# EAGLE board BassDrum (EAGLE 6.5.0)
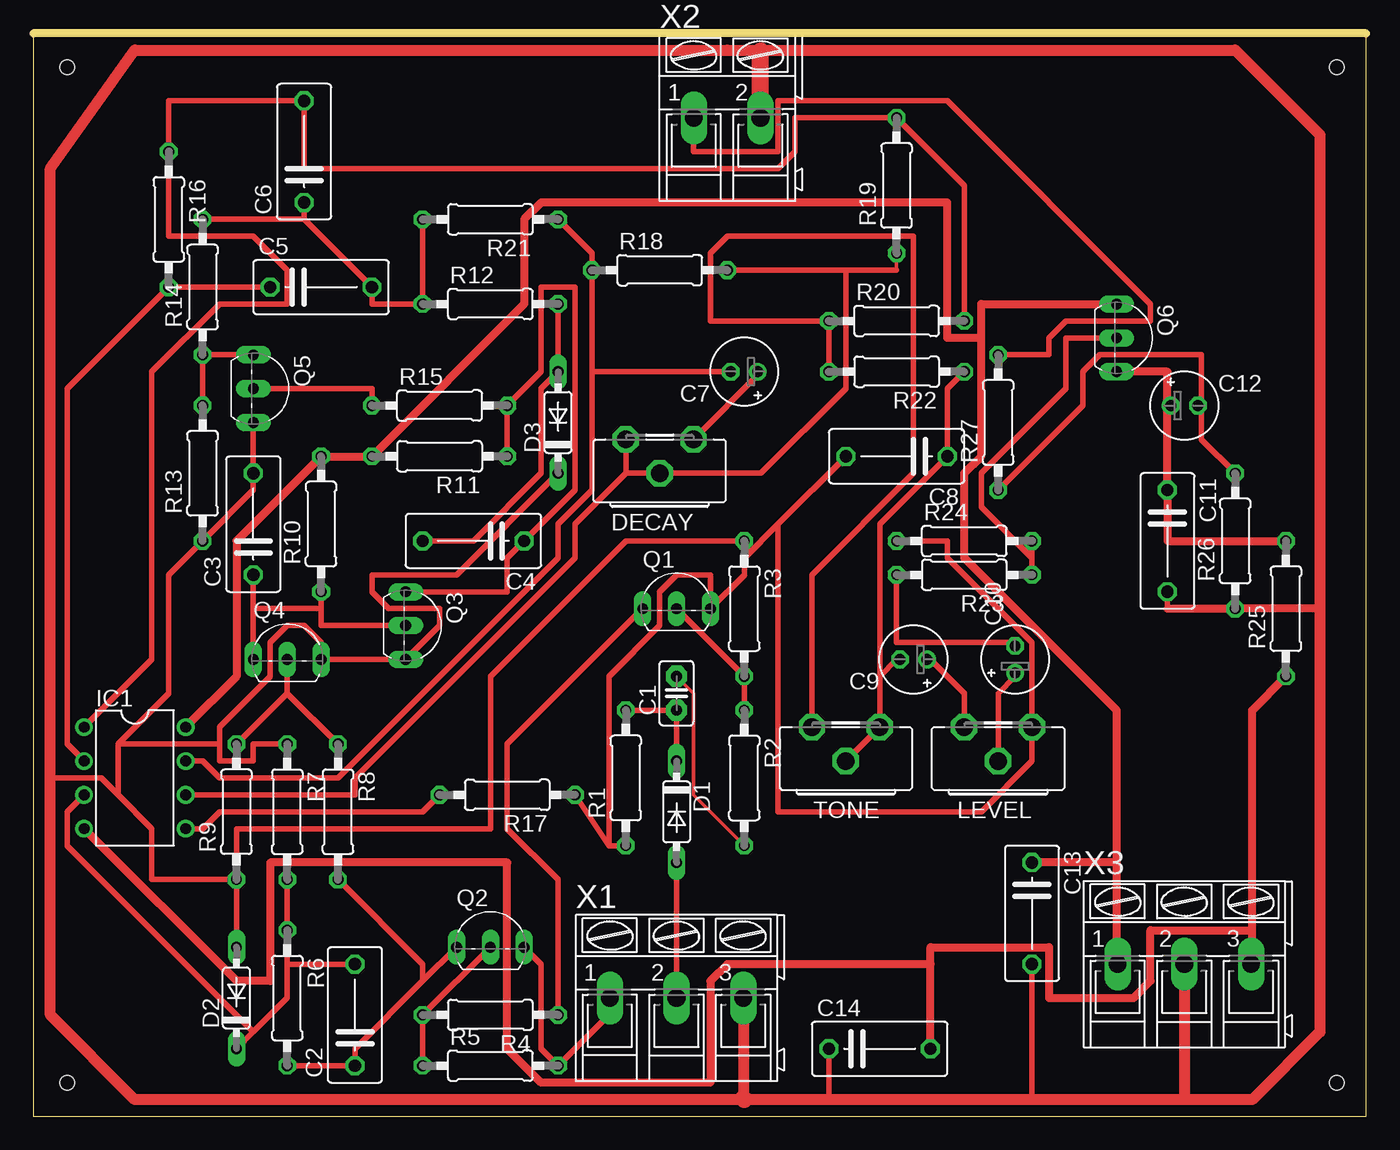
[diagram p0: board, top side]

Size 100 x 81.27 mm. Coordinates in mm from the lower left corner, seen from the top.
Outline: 0,0 100,0 100,81.27 0,81.27 0,0
Copper layers (1*16): Top 0.035mm / dielectric 1.5mm / Bottom 0.035mm
Design rules "default": minimum track width 10mil, minimum drill 24mil, track to track 8mil, track to pad 8mil, pad to pad 8mil, via to via 8mil, smd to smd 8mil, copper to edge 40mil, drill to drill 8mil, minimum pad ring 10mil, minimum via ring 8mil, stop-mask expansion 4mil, vias tented up to drill 0mil, thermal gap 10mil
Holes 1.1 mm at 2.54,2.54 97.79,2.54 97.79,78.74 2.54,78.74

## Footprints (pad centres in the part's own frame; a part is rotated, then mirrored left to right if it is on the bottom)
C2.5-2 = drill 0.813 pad 1.6 octagon: 1 -1.27,0; 2 1.27,0
C075-042X103 = drill 0.914 octagon: 1 -3.81,0; 2 3.81,0
E2-5 = drill 0.813 pad 1.27: + -1.016,0 | drill 0.813 pad 1.27 octagon: - 1.016,0
DO35-7 = drill 0.813 long: A 3.81,0; C -3.81,0
CA9H = drill 1.321 octagon: A -2.54,0; E 2.54,0; S 0,2.54
DIL08 = drill 0.813 pad 1.27: 1 -3.81,-3.81; 2 -1.27,-3.81; 3 1.27,-3.81; 4 3.81,-3.81; 5 3.81,3.81; 6 1.27,3.81; 7 -1.27,3.81; 8 -3.81,3.81
TO92-EBC = drill 0.813 long: B 0,-1.27; C -2.54,-1.27; E 2.54,-1.27
0207/10 = drill 0.813 octagon: 1 -5.08,0; 2 5.08,0
AK300/3 = drill 1.321 long: 1 -5.004,0; 2 0,0; 3 5.004,0
AK300/2 = drill 1.321 long: 1 -2.515,0; 2 2.489,0

## Placement (x,y rotation side)
C1  0.1  [C2.5-2]  48.26,31.75 90 top
C2  15n  [C075-042X103]  24.13,7.62 90 top
C3  100n  [C075-042X103]  16.51,44.45 90 top
C4  33n  [C075-042X103]  33.02,43.18 180 top
C5  15n  [C075-042X103]  21.59,62.23 0 top
C6  15n  [C075-042X103]  20.32,72.39 90 top
C7  33u/6.3V  [E2-5]  53.34,55.88 180 top
C8  100n  [C075-042X103]  64.77,49.53 180 top
C9  0.47u/50V  [E2-5]  66.04,34.29 180 top
C10  0.47u/50V  [E2-5]  73.66,34.29 90 top
C11  220p  [C075-042X103]  85.09,43.18 270 top
C12  1u/50V  [E2-5]  86.36,53.34 0 top
C13  100n  [C075-042X103]  74.93,15.24 270 top
C14  100n  [C075-042X103]  63.5,5.08 0 top
D1  1N4148DO35-7  [DO35-7]  48.26,22.86 270 top
D2  1N4148DO35-7  [DO35-7]  15.24,8.89 90 top
D3  1N4148DO35-7  [DO35-7]  39.37,52.07 90 top
DECAY  500k  [CA9H]  46.99,50.8 180 top
IC1  TL072P  [DIL08]  7.62,25.4 270 top
LEVEL  10k  [CA9H]  72.39,29.21 180 top
Q1  BC546A  [TO92-EBC]  48.26,39.37 0 top
Q2  BC556A  [TO92-EBC]  34.29,13.97 0 top
Q3  BC546A  [TO92-EBC]  29.21,36.83 270 top
Q4  BC546A  [TO92-EBC]  19.05,35.56 0 top
Q5  BC546A  [TO92-EBC]  17.78,54.61 270 top
Q6  BC546A  [TO92-EBC]  82.55,58.42 270 top
R1  100k  [0207/10]  44.45,25.4 90 top
R2  22k  [0207/10]  53.34,25.4 270 top
R3  10k  [0207/10]  53.34,38.1 270 top
R4  10k  [0207/10]  34.29,7.62 180 top
R5  4.7k  [0207/10]  34.29,3.81 0 top
R6  100k  [0207/10]  19.05,8.89 270 top
R7  4.7k  [0207/10]  19.05,22.86 270 top
R8  8.2k  [0207/10]  22.86,22.86 270 top
R9  2.7k  [0207/10]  15.24,22.86 90 top
R10  1M  [0207/10]  21.59,44.45 90 top
R11  22k  [0207/10]  30.48,49.53 180 top
R12  1M  [0207/10]  34.29,60.96 0 top
R13  47k  [0207/10]  12.7,48.26 90 top
R14  6.9k  [0207/10]  12.7,62.23 90 top
R15  100k  [0207/10]  30.48,53.34 0 top
R16  1M  [0207/10]  10.16,67.31 270 top
R17  22k  [0207/10]  35.56,24.13 180 top
R18  47k  [0207/10]  46.99,63.5 0 top
R19  47k  [0207/10]  64.77,69.85 90 top
R20  220  [0207/10]  64.77,59.69 0 top
R21  470k  [0207/10]  34.29,67.31 180 top
R22  10k  [0207/10]  64.77,55.88 180 top
R23  82k  [0207/10]  69.85,40.64 180 top
R24  100k  [0207/10]  69.85,43.18 0 top
R25  5.9k  [0207/10]  93.98,38.1 90 top
R26  100k  [0207/10]  90.17,43.18 90 top
R27  1k  [0207/10]  72.39,52.07 90 top
TONE  10k  [CA9H]  60.96,29.21 180 top
X1  ACC+TRIG  [AK300/3]  48.26,8.89 0 top
X2  OUT  [AK300/2]  52.07,74.93 0 top
X3  SUPPLY  [AK300/3]  86.36,11.43 0 top

## Library data of the parts
C1 = capacitor-wima
C2-C14 = rcl
D1-D3 = diode
DECAY LEVEL TONE = pot
IC1 = linear
Q1 Q3-Q6 = transistor-npn
Q2 = transistor-pnp
R1-R27 = resistor
X1-X3 = con-ptr500; OC_FARNELL: unknown; OC_NEWARK: unknown

## Nets
+15V: C13.1 IC1.8 Q6.C R10.2 R11.2 X3.1
-15V: C14.2 IC1.4 R25.1 X3.3
GND: C3.2 C8.2 C11.2 C13.2 C14.1 D2.A D3.C LEVEL.A Q1.E Q3.E Q4.E Q5.E R1.1 R3.1 R7.1 R9.1 R13.1 R17.1 R24.1 R26.1 X1.3 X2.2 X3.2
N$1: Q2.E R5.2 X1.1
N$2: C1.1 D1.C R1.2
N$3: C1.2 R2.2
N$4: Q1.B R2.1 R3.2
N$5: DECAY.E DECAY.S IC1.6 R18.2 R19.1
N$6: Q1.C R4.1
N$7: Q2.B R4.2 R5.1
N$8: D1.A X1.2
N$9: C2.1 Q2.C R6.2 R8.2
N$10: C2.2 D2.C IC1.3 R6.1 R7.2
N$11: Q4.B R8.1 R9.2
N$12: C4.2 D3.A R12.2
N$13: C3.1 Q3.B Q4.C R10.1
N$14: C4.1 Q3.C R11.1 R15.2
N$15: Q5.B R15.1
N$16: Q5.C R13.2 R14.1
N$17: IC1.5 R17.2
N$19: C5.1 IC1.2 R16.2
N$20: C6.2 IC1.1 R16.1 R19.2 R20.2
N$21: C7.- IC1.7 R18.1 R21.1
N$22: C7.+ DECAY.A
N$24: R20.1 R22.2 TONE.E
N$25: C8.1 C9.- R22.1 TONE.A TONE.S
N$26: C10.+ LEVEL.S
N$27: C10.- R23.2
N$28: Q6.B R23.1 R24.2
N$29: C9.+ LEVEL.E
N$30: C11.1 C12.+ Q6.E R25.2
N$31: C12.- R26.2 R27.1
N$32: R27.2 X2.1
N$33: C5.2 C6.1 R12.1 R14.2 R21.2

## Tracks (layer width: path | path; a pad name or v marks a point on that pad's centre or on a via)
+15V
  Top 0.254: 81.28,11.43 X3.1
  Top 0.61: IC1.8 15.24,33.02 15.24,43.18 R10.2 R11.2 36.83,60.96 36.83,67.31 38.1,68.58 68.58,68.58 68.58,58.42 71.12,58.42 | Q6.C 71.12,60.96 71.12,58.42 | 71.12,58.42 71.12,49.53 69.85,48.26 69.85,41.91 81.28,30.48 81.28,19.05 | 81.28,11.43 81.28,19.05 | 81.28,19.05 C13.1
-15V
  Top 0.254: 91.44,11.43 X3.3
  Top 0.61: R25.1 91.44,30.48 91.44,13.97 | 91.44,11.43 91.44,13.97 | IC1.4 15.24,10.16 17.78,10.16 17.78,19.05 35.56,19.05 35.56,5.08 38.1,2.54 50.8,2.54 50.8,10.16 52.07,11.43 67.31,11.43 | C14.2 67.31,11.43 | 91.44,13.97 83.82,13.97 83.82,10.16 82.55,8.89 76.2,8.89 76.2,12.7 67.31,12.7 67.31,11.43
GND
  Top 0.254: R3.1 53.34,41.91
  Top 0.406: R24.1 68.58,43.18 68.58,41.91 74.93,35.56 LEVEL.A 74.93,26.67 71.12,22.86 55.88,22.86 55.88,44.45 | R1.1 43.18,20.32 | 43.18,20.32 R17.1 | 55.88,44.45 53.34,41.91 53.34,40.64 Q1.E 50.8,40.64 48.26,40.64 46.99,39.37 46.99,36.83 43.18,33.02 43.18,20.32 | 55.88,44.45 C8.2 | R7.1 16.51,27.94 16.51,26.67 13.97,26.67 13.97,27.94 | 13.97,27.94 13.97,29.21 17.78,33.02 17.78,35.56 19.05,36.83 20.32,36.83 21.59,35.56 Q4.E Q3.E 30.48,36.83 30.48,38.1 26.67,38.1 25.4,39.37 25.4,40.64 31.75,40.64 D3.C | Q5.E C3.2 16.51,46.99 R13.1 10.16,40.64 10.16,31.75 6.35,27.94 | C11.2 85.09,38.1 | R9.1 D2.A | 59.69,1.27 C14.1 | 74.93,1.27 C13.2 | R9.1 8.89,17.78 8.89,21.59 6.35,24.13 | 6.35,24.13 5.08,25.4 1.27,25.4 | 6.35,24.13 6.35,27.94 | 6.35,27.94 13.97,27.94 | R9.1 15.24,21.59 34.29,21.59 34.29,33.02 44.45,43.18 R3.1
  Top 0.61: 85.09,38.1 R26.1 96.52,38.1
  Top 0.813: 86.36,1.27 91.44,1.27 96.52,6.35 96.52,38.1 96.52,73.66 90.17,80.01 52.07,80.01 | 86.36,1.27 74.93,1.27 59.69,1.27 53.34,1.27 7.62,1.27 1.27,7.62 1.27,25.4 1.27,71.12 7.62,80.01 52.07,80.01 | 54.56,79.96 52.07,80.01 | X1.3 53.26,1.35 | X3.2 86.36,1.27
  Top 1.27: X2.2 54.56,79.96 | 53.26,1.35 53.34,1.27
N$1
  Top 0.254: 43.18,8.89 X1.1
  Top 0.406: 43.18,8.89 43.18,7.62 R5.2 38.1,5.08 38.1,11.43 Q2.E
N$2
  Top 0.406: R1.2 C1.1 D1.C
N$3
  Top 0.254: R2.2 49.53,24.13 49.53,31.75 C1.2
N$4
  Top 0.406: R2.1 R3.2 Q1.B
N$5
  Top 0.254: R19.1 64.77,63.5
  Top 0.406: 64.77,63.5 60.96,63.5 | 60.96,63.5 R18.2 | IC1.6 24.13,24.13 24.13,25.4 40.64,41.91 40.64,44.45 44.45,48.26 | DECAY.E 44.45,48.26 | 44.45,48.26 DECAY.S 54.61,48.26 60.96,54.61 60.96,63.5
N$6
  Top 0.406: R4.1 39.37,17.78 35.56,21.59 35.56,27.94 Q1.C
N$7
  Top 0.406: R5.1 R4.2 Q2.B
N$8
  Top 0.406: X1.2 D1.A
N$9
  Top 0.406: R6.2 C2.1 24.13,5.08 29.21,10.16 | 29.21,10.16 Q2.C | R8.2 29.21,11.43 29.21,10.16
N$10
  Top 0.406: 16.51,6.35 19.05,8.89 19.05,11.43 | 16.51,6.35 D2.C | 19.05,11.43 R6.1 R7.2 | IC1.3 2.54,22.86 2.54,20.32 16.51,6.35 | 19.05,11.43 C2.2
N$11
  Top 0.406: 19.05,31.75 R9.2 | Q4.B 19.05,31.75 | 19.05,31.75 R8.1
N$12
  Top 0.406: R12.2 D3.A 38.1,54.61 38.1,48.26 33.02,43.18 C4.2
N$13
  Top 0.406: C3.1 16.51,38.1 | 16.51,38.1 Q4.C | Q3.B 21.59,36.83 21.59,38.1 | R10.1 21.59,38.1 | 21.59,38.1 16.51,38.1
N$14
  Top 0.406: R11.1 R15.2 38.1,55.88 38.1,62.23 40.64,62.23 40.64,46.99 C4.1 35.56,41.91 35.56,39.37 Q3.C
N$15
  Top 0.406: Q5.B 25.4,54.61 R15.1
N$16
  Top 0.406: R13.2 R14.1 Q5.C
N$17
  Top 0.406: IC1.5 12.7,21.59 13.97,22.86 29.21,22.86 R17.2
N$19
  Top 0.406: IC1.2 2.54,27.94 2.54,54.61 R16.2 C5.1
N$20
  Top 0.406: R20.2 69.85,69.85 R19.2 57.15,74.93 57.15,72.39 55.88,71.12 20.32,71.12 C6.2 10.16,76.2 R16.1 10.16,66.04 16.51,66.04 19.05,63.5 19.05,60.96 13.97,60.96 8.89,55.88 8.89,34.29 IC1.1
N$21
  Top 0.406: IC1.7 12.7,26.67 13.97,25.4 22.86,25.4 39.37,41.91 39.37,44.45 41.91,46.99 41.91,55.88 | 41.91,55.88 R18.1 41.91,64.77 R21.1 | 41.91,55.88 C7.-
N$22
  Top 0.254: 54.61,55.88 C7.+
  Top 0.406: DECAY.A 54.61,55.88
N$24
  Top 0.406: R22.2 R20.1 50.8,59.69 50.8,64.77 52.07,66.04 66.04,66.04 66.04,48.26 58.42,40.64 TONE.E
N$25
  Top 0.254: 64.77,34.29 C9.-
  Top 0.406: R22.1 68.58,54.61 C8.1 63.5,44.45 63.5,33.02 | 63.5,33.02 64.77,34.29 | 63.5,33.02 TONE.A TONE.S
N$26
  Top 0.254: 73.66,33.02 C10.+
  Top 0.406: 73.66,33.02 72.39,31.75 LEVEL.S
N$27
  Top 0.254: 73.66,35.56 C10.-
  Top 0.406: 73.66,35.56 64.77,35.56 R23.2
N$28
  Top 0.406: R24.2 74.93,41.91 | 74.93,41.91 R23.1 | Q6.B 77.47,58.42 77.47,54.61 71.12,48.26 71.12,45.72 74.93,41.91
N$29
  Top 0.254: 67.31,34.29 C9.+
  Top 0.406: 67.31,34.29 69.85,31.75 LEVEL.E
N$30
  Top 0.254: 85.09,53.34 C12.+
  Top 0.61: Q6.E 85.09,55.88 85.09,53.34 C11.1 85.09,43.18 R25.2
N$31
  Top 0.254: 87.63,53.34 C12.-
  Top 0.406: R27.1 78.74,53.34 78.74,55.88 80.01,57.15 87.63,57.15 87.63,53.34 87.63,50.8 R26.2
N$32
  Top 0.254: 49.53,74.93 X2.1
  Top 0.406: R27.2 76.2,57.15 76.2,58.42 77.47,59.69 83.82,59.69 83.82,60.96 68.58,76.2 55.88,76.2 55.88,72.39 49.53,72.39 49.53,74.93
N$33
  Top 0.406: 20.32,67.31 R14.2 | C6.1 20.32,67.31 | R21.2 R12.1 25.4,60.96 C5.2 20.32,67.31